# Altium PCB EST_MainV20.PcbDoc (part 7 of 7)
Units mil, origin at the board's own origin, x right, y up, seen from the top; angles counter-clockwise.
Board outline 2745 x 4540 mil, 2 copper layers (Top Layer, Bottom Layer); 326 components, 241 nets, 1052 pads, 399 vias.
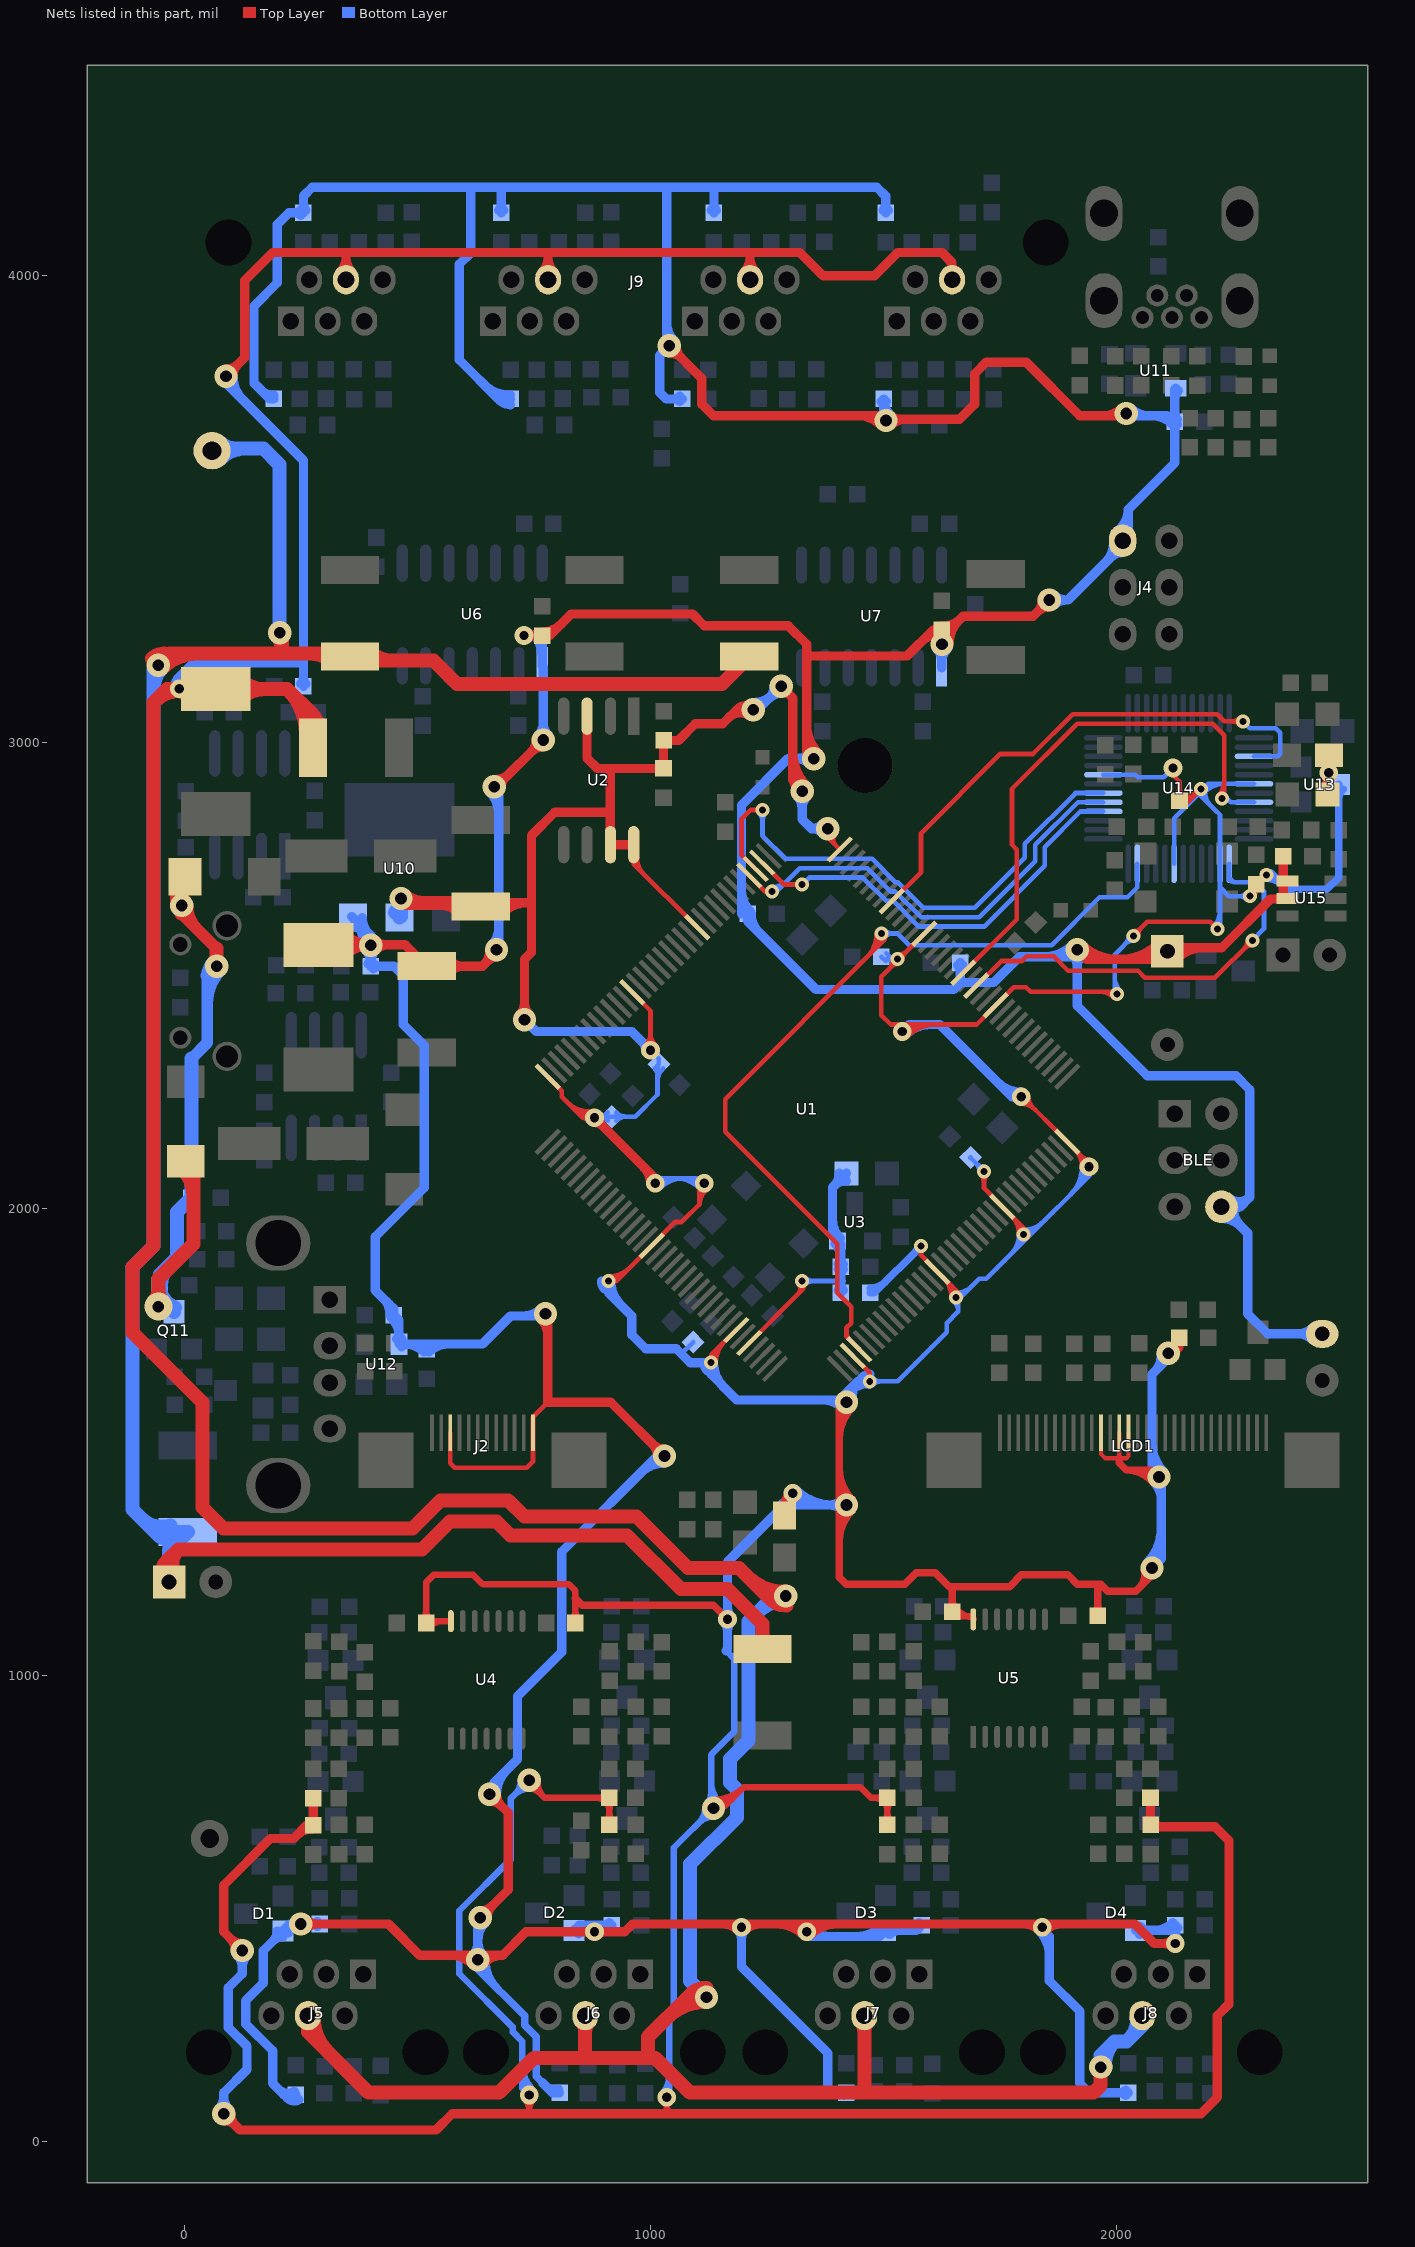
[diagram p7: the nets of this part, all layers, seen from the top]

## Via types
v1: diameter 30, hole 15, Top Layer to Bottom Layer, 237 vias
v2: diameter 50, hole 25, Top Layer to Bottom Layer, 93 vias
v3: diameter 40, hole 20, Top Layer to Bottom Layer, 68 vias
v4: diameter 60, hole 25, Top Layer to Bottom Layer, 1 vias

## Nets (pads, with @x,y where several pads share a name; then routed paths per layer and width w, separated by ;. In a path a pad name is that pad's centre, name@x,y a point inside that pad or via, vN(x,y) a via of type N, cw(c..) or ccw(c..) an arc to the next point about the centre after c; other vN are vias at no path point) (continued)
V33: C11.2 C24.1 C26.1 C28.1 C30.1 C70.1 C71.2 C83.1 C84.1 C85.1 E7.1 L1.2 LCD1.16 LCD1.17 LCD1.19 R2.1 R5.2 R6.1 R7.2 R12.2 R61.1 R62.1 R63.1 R64.1 R73.1 R74.1 R75.1 R76.1 R164.2 R165.1 U1.17 U1.30 U1.39 U1.52 U1.62 U1.72 U1.84 U1.95 U1.108 U1.121 U1.131 U1.144 U2.3 U2.7 U2.8 U4.14 U5.14 U10.2 U13.3 U14.6 U14.14 U14.19 U14.32 | length 26522.3
  Top Layer w9: LCD1.19@1965.67,1520 1965.67,1474.33 1975,1465 2005.04,1465 ; LCD1.17@2005.04,1520 2005.04,1465.04 ; LCD1.16@2024.72,1520 2024.72,1469.72 2020,1465 2005.04,1465
  Top Layer w10: U1.144@779.73,2282.96 810,2252.69 810,2240 855,2195 v3(880,2195) ; 822.5,2227.5 ccw(c867.26,2272.26) v3@877.56,2209.8 ; 836.27,2213.73 ccw(c871.16,2248.62) v3@879.19,2199.93 ; 850.04,2199.96 ccw(c875.06,2224.97) v3@880.81,2190.07 ; v1@910,1855 ccw(c910,1918.7) 955.05,1873.66 ; 937.98,1856.59 cw(c910,1884.56) v1(910,1845) 926.39,1845 U1.17@1002.44,1921.06 1053.19,1971.81 1066.81,1971.81 1105,2010 v3@1105,2065 ; U1.131@960.69,2463.91 1000,2424.6 v3(1000,2340) ; U2.8@961,2752.41 ccw(c986.16,2752.41) 968.37,2734.61 ; U2.8@964,2780.41 964,2738.99 ; U2.8@971,2752.41 ccw(c1020.31,2752.41) 985.44,2717.54 ; v3@989.39,2350.61 ccw(c963.79,2376.21) 1000,2376.21 ccw(c1036.21,2376.21) v3@1010.61,2350.61 ; v3@1010,2065 v3@1015,2065 ; U1.121@1099.88,2603.11 964,2738.99 ; 1105,2008.9 cw(c1145,2008.9) v3@1123.18,2042.43 ; 1105,2027.34 cw(c1133,2027.34) v3@1117.73,2050.81 ; v1@1140,1670 cw(c1204.48,1670) U1.30@1158.89,1715.59 ; 1141.81,1698.52 ccw(c1170.34,1670) v1(1130,1670) 1130,1686.71 U1.30@1183.4,1740.1 ; v2(1380,2815) 1380,2796.25 U1.108@1406.11,2770.14 ; v2@1387.77,2808.7 ccw(c1400.16,2798.65) 1388.88,2787.37 ; v2@1395.54,2802.4 ccw(c1408.83,2791.62) 1396.73,2779.52 ; U1.39@1433.94,1684.43 1470,1648.37 v1(1470,1630) ; 1510.9,2513.03 ccw(c1488.93,2535) v1@1520,2535 ; 1517.83,2519.96 cw(c1530,2507.79) v1@1530,2525 ; v1@1530,2545 ccw(c1530,2576.07) 1551.97,2554.1 ; v3@1536.46,2383.54 cw(c1564.14,2355.86) 1564.14,2395 ; v1@1540,2535 cw(c1557.21,2535) 1545.04,2547.17 ; v3@1543.54,2376.46 cw(c1588.28,2331.72) 1588.28,2395 ; v3@1550.61,2369.39 cw(c1612.43,2307.57) 1612.43,2395 ; v1(1580,1920) 1580,1900.28 U1.52@1614.9,1865.38 1660,1820.28 v1@1660,1805 ; U1.95@1587.06,2589.19 1495,2497.13 1495,2415 1515,2395 1699.1,2395 U1.84@1740.17,2436.07 1779.1,2475 1805,2475 1815,2465 1995,2465 v1(2000,2460) ; U1.52@1627.13,1853.15 cw(c1583.98,1810) v1@1645,1810 ; 1644.2,1836.08 cw(c1618.12,1810) v1(1655,1810) ; v1@1707.93,2072.93 cw(c1690.86,2055.86) 1715,2055.86 cw(c1739.14,2055.86) v1@1722.07,2072.93 ; v1(1715,2080) 1715,2043.66 U1.62@1754.09,2004.57 1810,1948.66 v1@1810,1940 ; U1.62@1773.27,1985.4 cw(c1732.87,1945) v1@1790,1945 ; 1790.34,1968.32 cw(c1767.01,1945) v1(1800,1945) ; v3@1792.05,2245 U1.72@1893.28,2143.77 v3@1940,2097.05 ; v3@1795,2225 cw(c1795,2183.84) 1824.11,2212.94 ; v3@1810,2240 ccw(c1841.26,2240) 1819.16,2217.89 ; U1.72@1909.41,2127.64 cw(c1871.76,2090) v3@1925,2090 ; 1926.48,2110.57 cw(c1905.91,2090) v3@1935,2090 ; 1926.43,2110.62 ccw(c1940,2124.19) v3@1940,2105 ; 1963.79,2465 cw(c1963.79,2423.79) v1@1992.93,2452.93 ; v1(2035,2585) 2065,2615 2200,2615 v1(2215,2600) ; v1@2035,2595 ccw(c2035,2619.14) 2052.07,2602.07 ccw(c2069.14,2585) v1@2045,2585 ; v3(2120,2945) 2120,2930 2134,2916 R165.1@2134,2875.02 2155.02,2875.02 ; R165.1@2125.01,2884.01 ccw(c2103.3,2905.72) 2134,2905.72 ccw(c2164.7,2905.72) R165.1@2142.99,2884.01 ; R165.1@2132.41,2867.91 ccw(c2137.56,2890.96) 2154.26,2874.26 ; R165.1@2134.59,2877.67 ccw(c2142.25,2912.01) 2167.13,2887.13 ; R165.1@2136.77,2887.43 ccw(c2146.94,2933.05) v1(2180,2900) 2155.02,2875.02 ; R165.1@2145.26,2869.12 cw(c2155.02,2864.01) 2155.02,2875.02 ; R165.1@2145.26,2880.92 ccw(c2155.02,2886.02) 2155.02,2875.02 ; v1@2290,2670 2298.84,2678.84 C70.1@2298.84,2695.88 ; 964,2738.99 ccw(c954.63,2738.99) 959.99,2746.67 cw(c954.63,2738.99) 964,2738.99 ; 964,2738.99 cw(c973.37,2738.99) 968.01,2746.67 ccw(c973.37,2738.99) 964,2738.99
  Top Layer w14: R74.1@511.42,1119.59 ccw(c493.13,1137.89) 519,1137.89 ccw(c544.87,1137.89) R74.1@526.58,1119.59 ; R74.1@526.58,1104.44 cw(c554.41,1076.6) 554.41,1115.97 ; U4.14@572,1115.97 522.95,1115.97 R74.1@519,1112.02 519,1199 535,1215 620,1215 640,1195 825,1195 839,1181 839,1165 R75.1@839,1112.02 ; v3@730.81,90.81 cw(c708.62,68.62) 740,68.62 cw(c771.38,68.62) v3@749.19,90.81 ; 740,60 v3(740,100) ; v2@740,757 cw(c740,725.62) 762.19,747.81 ; v2@745,765 773.12,736.88 C26.1@911.84,736.88 R62.1@911.84,679.14 ; v2@757.95,773.62 ccw(c801.51,770.28) 770.62,739.38 ; R75.1@831.42,1119.59 ccw(c813.13,1137.89) 839,1137.89 ccw(c864.87,1137.89) R75.1@846.58,1119.59 ; C26.1@904.27,744.46 cw(c885.97,762.75) 885.97,736.88 cw(c885.97,711.01) 904.27,729.3 cw(c885.97,711.01) 911.84,711.01 cw(c937.71,711.01) C26.1@919.42,729.3 ; R62.1@904.41,686.58 ccw(c886.45,704.53) 911.84,704.53 ; 911.84,705.21 ccw(c938.2,705.21) R62.1@919.56,686.58 ; 1035,60 1040,65 ; 1035,65 v3(1035,95) ; v2(1135,715) 1130,720 1160,720 1200,760 1450,760 1473.12,736.88 C28.1@1507.84,736.88 1507.84,679.14 R63.1@1507.98,679 ; v2@1135,719 ccw(c1135,776.94) 1175.97,735.97 ; v2@1135,733 ccw(c1135,824.74) 1199.87,759.87 ; C28.1@1500.27,744.46 cw(c1481.97,762.75) 1481.97,736.88 cw(c1481.97,711.01) 1500.27,729.3 cw(c1481.97,711.01) 1507.84,711.01 cw(c1533.71,711.01) C28.1@1515.42,729.3 ; R63.1@1500.41,686.58 ccw(c1482.45,704.53) 1507.84,704.53 ; 1507.84,705.21 ccw(c1534.2,705.21) R63.1@1515.56,686.58 ; R76.1@1639,1126.02 1688.05,1126.02 cw(c1688.05,1166.32) R76.1@1655.62,1142.38 ; 1679.09,1126.02 cw(c1679.09,1107.06) U5.14@1692.5,1120.46
  Top Layer w16: 839,1165 854,1150 1135,1150 v3(1165,1120) ; L1.2@1280.78,1362.8 ccw(c1277.09,1372.06) 1287.06,1372.06 ; L1.2@1287.06,1338.76 cw(c1333.88,1338.76) v3@1310.89,1379.55 ; L1.2@1287.06,1342 1287.06,1372.06 ; L1.2@1287.06,1366.15 cw(c1318.45,1366.15) v3@1303.04,1393.48 ; L1.2@1287.91,1347.54 cw(c1307.07,1359.86) v3@1290.96,1375.96 ; L1.2@1293.35,1362.8 cw(c1297.04,1372.06) 1287.06,1372.06 ; L1.2@1301.36,1356.19 cw(c1324.16,1370.84) v3(1305,1390) 1287.06,1372.06 ; 1405,1287.75 cw(c1497.25,1287.75) v2@1432.02,1352.98 ; 1405,1326.37 cw(c1458.63,1326.37) v2@1420.71,1364.29 ; 1405,1403.63 ccw(c1458.63,1403.63) v2@1420.71,1365.71 ; 1405,1442.25 ccw(c1497.25,1442.25) v2@1432.02,1377.02 ; 1405,1507.75 cw(c1497.25,1507.75) v2@1432.02,1572.98 ; 1405,1546.37 cw(c1458.63,1546.37) v2@1420.71,1584.29 ; v2@1415,1600 1405,1590 1405,1210 1420,1195 1545,1195 1570,1220 1610,1220 1640,1190 1647,1190 ; R76.1@1640.13,1142.89 ccw(c1623.54,1159.47) 1647,1159.47 ccw(c1670.46,1159.47) R76.1@1653.87,1142.89 ; R76.1@1647,1136.02 1647,1190 ; R73.1@1952.13,1134.89 ccw(c1935.54,1151.47) 1959,1151.47 ccw(c1982.46,1151.47) R73.1@1965.87,1134.89 ; R73.1@1952.23,1134.99 ccw(c1936.68,1151) 1959,1151 ; R73.1@1965.77,1134.99 cw(c1981.32,1151) 1959,1151 ; 2005.04,1465 2005.04,1455 2020.04,1440 ; 2047.5,1187.5 ccw(c2018.39,1216.62) v2@2058.46,1226.09 ; 2055.02,1440 cw(c2055.02,1394.77) v2@2089.24,1424.35 ; v2@2077.14,1413.88 ccw(c2020.04,1364.53) 2020.04,1440 ; v2@2080,1235 2080,1220 2040,1180 1980,1180 1965,1195 ; v2@2095,1425 v2(2090,1425) 2075,1440 2020.04,1440 ; v1@2315,2720 v1@2320,2720 ; 1647,1190 1770,1190 1795,1215 1895,1215 1915,1195 1965,1195 ; 1959,1151 R73.1@1959,1128.02 1959,1189 1965,1195
  Top Layer w20: v2@85,45 cw(c85,8.79) 110.61,34.39 cw(c136.21,60) v2@100,60 ; v2(85,60) 120,25 540,25 575,60 740,60 1035,60 2180,60 2215,95 2215,270 2240,295 2240,645 2210,675 2075.98,675 R64.1@2071.98,679 2071.84,679.14 C30.1@2071.84,736.88 ; v2@110,410 ccw(c73.79,410) 99.39,435.61 ccw(c125,461.21) v2@125,425 ; v2(125,410) 85,450 85,550 185,650 235,650 263.72,678.72 R61.1@277.17,678.72 C24.1@277.17,736.46 ; 241.04,656.04 cw(c277.17,619.9) R61.1@277.17,671 ; C24.1@271.57,731.15 cw(c258.06,717.63) 277.17,717.63 ; R61.1@271.72,684.18 ccw(c258.54,697.35) 277.17,697.35 ccw(c295.8,697.35) R61.1@282.63,684.18 ; 277.17,718.31 cw(c295.32,718.31) C24.1@282.49,731.15 ; E7.1@616,2656 636,2656 741,2656 745,2660 ; E7.1@682.64,2633.86 cw(c736.1,2580.4) 736.1,2656 ; E7.1@682.64,2662.14 ccw(c697.47,2676.97) E7.1@697.47,2656 ; v2@719.39,2415.61 ccw(c693.79,2441.21) 730,2441.21 ccw(c766.21,2441.21) v2@740.61,2415.61 ; v2(730,2405) 730,2535 745,2550 745,2660 ; U2.3@864,3056 864,2966 886.12,2943.88 915,2943.88 ; v3@880,2185 cw(c880,2160.86) 897.07,2177.93 cw(c914.14,2195) v3@890,2195 ; v3(880,2195) v3@1010,2065 ; U2.8@964,2780.41 U2.7@914,2780.41 914,2850 ; 985.86,2089.14 cw(c951.72,2055) v3@1000,2055 ; C11.2@1022.39,2938.42 ccw(c1009.21,2925.25) 1009.21,2943.88 ccw(c1009.21,2962.5) 1022.39,2949.33 ccw(c1008.87,2962.84) 1027.98,2962.84 ; R7.2@1022.53,2998.55 cw(c1009.35,2985.38) 1027.98,2985.38 cw(c1046.61,2985.38) 1033.44,2998.55 cw(c1046.61,2985.38) 1046.61,3004.01 cw(c1046.61,3022.64) R7.2@1033.44,3009.46 ; 1027.98,2962.16 ccw(c1046.13,2962.16) C11.2@1033.3,2949.33 ; 1167.5,3052.5 cw(c1192.74,3027.26) v2@1211.93,3057.35 ; 1170.21,3055.21 cw(c1218.06,3007.35) v2@1220.15,3075 ; 1185.11,3070.11 cw(c1206.46,3048.77) v2@1222.69,3074.22 ; v2@1209.14,3059.66 ccw(c1185,3036.67) 1185,3070 ; v2@1209.14,3080.34 cw(c1185,3103.33) 1185,3070 ; v2(1220,3070) 1185,3070 ; v2(1280,3120) 1305,3095 1305,2920 v2@1320,2905 ; 1305,2931.21 ccw(c1361.21,2931.21) v2@1321.46,2891.46 ; 1305,2979.5 ccw(c1409.5,2979.5) v2@1335.61,2905.61 ; C30.1@2066.39,731.43 cw(c2053.21,718.25) 2071.84,718.25 cw(c2090.47,718.25) C30.1@2077.3,731.43 ; R64.1@2066.53,684.46 ccw(c2053.7,697.29) 2071.84,697.29 ; 2071.84,697.97 ccw(c2090.95,697.97) 2077.44,684.46 ccw(c2100.27,707.29) 2100.27,675 ; v2@2110,1680 2133,1703 R2.1@2133,1723.98 ; v2@2120.49,1690.49 ccw(c2101.39,1709.59) R2.1@2125.98,1720.79 ; R2.1@2127.54,1718.53 cw(c2114.37,1705.35) 2133,1705.35 cw(c2151.63,1705.35) R2.1@2138.46,1718.53 ; C71.2@2440.64,2898.96 ccw(c2408.4,2931.2) v3@2454,2931.2 ; R164.2@2443.39,2961.33 cw(c2417.79,2935.72) 2454,2935.72 cw(c2490.21,2935.72) R164.2@2464.61,2961.33 ; v3@2446.93,2927.93 cw(c2429.86,2910.86) 2454,2910.86 cw(c2478.14,2910.86) v3@2461.07,2927.93 ; v3@2446.93,2942.07 ccw(c2429.86,2959.14) 2454,2959.14 ccw(c2478.14,2959.14) v3@2461.07,2942.07 ; C71.2@2451.67,2887.94 2454,2890.27 v3(2454,2935) R164.2@2454,2971.94 ; v3@2454,2919.95 ccw(c2483.68,2919.95) C71.2@2462.69,2898.96 ; 745,2660 745,2800 795,2850 914,2850 ; 914,2850 914,2942.88 915,2943.88 ; 915,2943.88 C11.2@1027.84,2943.88 1027.98,2944.02 R7.2@1027.98,3004.01 1060,3004.01 1095.99,3040 1155,3040 1185,3070
  Top Layer w30: v2(465,2665) 474,2656 E7.1@616,2656 ; v2@472.07,2672.07 ccw(c510.87,2710.87) 510.87,2656 ; 547.97,2656 cw(c547.97,2592.47) E7.1@592.89,2637.39
  Bottom Layer w10: v3(880,2195) 882.37,2197.37 R12.2@917.39,2197.37 ; v3@890.61,2205.61 ccw(c910.5,2225.5) R12.2@910.5,2197.37 ; v3@891.46,2185.32 cw(c917.39,2163.44) R12.2@917.39,2197.37 ; R12.2@908.4,2188.37 ccw(c886.69,2166.67) 886.69,2197.37 ccw(c886.69,2228.07) R12.2@908.4,2206.36 ; R12.2@926.38,2188.37 cw(c948.09,2166.67) 948.09,2197.37 cw(c948.09,2228.07) R12.2@926.38,2206.36 ; v3(1000,2340) 1017.89,2322.11 C84.1@1017.89,2309.89 1015,2307.01 1015,2245 967.37,2197.37 R12.2@917.39,2197.37 ; C84.1@1008.89,2300.9 cw(c994.15,2286.16) 1015,2286.16 ; v3@1013.54,2051.46 cw(c1046.21,2018.79) 1046.21,2065 ; v3@1015,2065 v3@1105,2065 ; 1015,2272.23 cw(c1055.55,2272.23) C84.1@1026.88,2300.9 ; v3@1020.61,2044.39 cw(c1070.36,1994.64) 1070.36,2065 ; 1054.64,2065 cw(c1054.64,1994.64) v3@1104.39,2044.39 ; 1067.18,1690 R5.2@1091.4,1714.22 ; 1078.79,2065 cw(c1078.79,2018.79) v3@1111.46,2051.46 ; v1(1470,1630) 1530,1630 1635,1735 1635,1755 1660,1780 1660,1805 1705,1850 1720,1850 1810,1940 1940,2070 v3(1940,2090) ; v1@1477.07,1622.93 cw(c1494.14,1605.86) 1494.14,1630 cw(c1494.14,1654.14) v1@1477.07,1637.07 ; C83.1@1495.12,2540.16 1500.28,2535 v1(1530,2535) cw(c1530,2565.26) C83.1@1505.44,2547.58 ; C83.1@1504.11,2531.17 cw(c1513.37,2521.91) 1513.37,2535 ; v1@1522.93,2527.93 ccw(c1505.86,2510.86) 1505.86,2535 ccw(c1505.86,2559.14) v1@1522.93,2542.07 ; v1@1648.91,1802.07 cw(c1631.67,1779.59) 1660,1779.59 ; v1(1655,1810) ccw(c1655,1834.14) 1672.07,1817.07 ; v1@1655,1820 ccw(c1655,1868.28) 1689.14,1834.14 ; C85.1@1686.11,2110.11 1686.11,2108.89 v1(1715,2080) ; v1@1705,2080 ccw(c1680.86,2080) 1697.93,2097.07 ccw(c1715,2114.14) v1@1715,2090 ; 1772.32,1902.32 ccw(c1729.64,1945) v1@1790,1945 ; 1789.39,1919.39 ccw(c1763.79,1945) v1(1800,1945) ccw(c1800,1981.21) 1825.61,1955.61 ; v1@1800,1955 ccw(c1800,2015.36) 1842.68,1972.68 ; 1900.25,2030.25 ccw(c1840.5,2090) v3@1925,2090 ; 1917.32,2047.32 ccw(c1874.64,2090) v3@1935,2090 ; 1934.39,2064.39 ccw(c1908.79,2090) v3@1945,2090 ; U14.32@1970.91,2930.52 2039.48,2930.52 2045,2925 2100,2925 v3(2120,2945) ; v1@1995,2465 1995,2545 v1(2035,2585) ; 1995,2496.21 ccw(c2036.21,2496.21) v1@2007.07,2467.07 ; v1@2025,2585 cw(c2000.86,2585) 2017.93,2567.93 cw(c2035,2550.86) v1@2035,2575 ; U14.19@2122.48,2739.57 2122.48,2837.48 v1@2182.5,2897.5 ; 2159.39,2874.39 ccw(c2133.79,2900) v1@2170,2900 ; 2171.46,2886.46 cw(c2180,2877.93) v1@2180,2890 ; v1@2176.59,2888.41 2207.5,2857.5 ; v1@2182.5,2887.5 v1@2182.5,2897.5 ; 2186.65,2878.35 cw(c2203.76,2895.45) v1(2180,2900) cw(c2206.16,2873.84) 2206.16,2910.83 ; v1@2187.07,2892.93 cw(c2230.3,2849.7) 2230.3,2910.83 ; v1@2189.82,2898.12 ccw(c2226.16,2891.16) 2200,2865 ; v1@2207.93,2607.07 ccw(c2176.6,2638.4) 2220.91,2638.4 ; 2215,2850 2207.5,2857.5 ; 2220.91,2614.26 cw(c2200.74,2614.26) v1(2215,2600) 2220.91,2605.91 2220.91,2689.09 ; v1@2277.93,2662.93 ccw(c2260.86,2645.86) 2260.86,2670 ccw(c2260.86,2694.14) v1@2277.93,2677.07 ; v1(2285,2670) 2240,2670 2220.91,2689.09 ; U14.6@2293.74,2910.83 2195.83,2910.83 v1@2182.5,2897.5 ; 2207.5,2857.5 2220.91,2844.09 U14.14@2220.91,2739.57 2220.91,2689.09
  Bottom Layer w14: v2@722,775 cw(c678.54,775) 709.27,744.27 cw(c740,713.54) v2@740,757 ; 725,133.8 ccw(c773.8,133.8) v3@739.29,99.29 ; 725,167.6 ccw(c807.6,167.6) v3@749.19,109.19 ; v3(740,100) 725,115 725,215 705,235 705,245 590,360 590,495 700,605 700,735 730,765 v2@745,765 ; v3@1025.81,104.19 ccw(c991.54,138.46) 1040,138.46 ; v3@1040,95 1040,280 1050,290 1050,630 1130,710 v2@1130,720 ; v2@1117,715 cw(c1073.54,715) 1104.27,684.27 cw(c1135,653.54) v2@1135,697 ; v2@1122.27,727.73 ccw(c1103.62,746.38) 1130,746.38 ; 1130,770.53 ccw(c1190.53,770.53) v2@1147.73,727.73 ; v2(1135,715) v2@1130,720 ; 1162.5,1052.5 1180,1035 1180,880 1130,830 v2@1130,720 ; 1287.06,1365 1287.06,1372.06 v3(1305,1390)
  Bottom Layer w16: R6.1@1471,1819.98 1479.98,1819.98 v1(1580,1920) ; R6.1@1471,1829.7 ccw(c1471,1874.85) 1502.92,1842.92 ; v1@1573,1920 cw(c1556.1,1920) 1568.05,1908.05 cw(c1580,1896.1) v1@1580,1913 ; v1@2315,2720 2330,2720 2365,2685 2450,2685 2475,2710 U13.3@2475,2910 ; v1@2320,2708 cw(c2320,2654.89) 2357.56,2692.44 ; U13.3@2464.75,2899.75 cw(c2439.99,2874.99) 2475,2874.99 cw(c2510.01,2874.99) U13.3@2485.25,2899.75
  Bottom Layer w20: v2@74.39,70.61 ccw(c48.79,96.21) 85,96.21 ccw(c121.21,96.21) v2@95.61,70.61 ; v2(85,60) 85,105 135,155 135,205 95,245 95,330 125,360 v2(125,410) ; v2@114.39,399.39 cw(c88.79,373.79) 125,373.79 cw(c161.21,373.79) v2@135.61,399.39 ; v2(730,2405) 755,2380 960,2380 v3(1000,2340) ; v1@895,1845 ccw(c919.14,1845) 902.07,1827.93 ; v1(910,1845) 910,1820 960,1770 960,1730 990,1700 1055,1700 1085,1670 v1(1130,1670) 1130,1645 1185,1590 1405,1590 1445,1630 ; v1@915,1845 ccw(c987.43,1845) 936.21,1793.79 ; v3@990,2340 ccw(c965.86,2340) 982.93,2357.07 ccw(c1000,2374.14) v3@1000,2350 ; v1@1115,1670 ccw(c1139.14,1670) 1122.07,1652.93 ; v1@1135,1670 ccw(c1207.43,1670) 1156.21,1618.79 ; v3@1157.93,1112.93 cw(c1140.86,1095.86) 1165,1095.86 cw(c1189.14,1095.86) v3@1172.07,1112.93 ; v3@1157.93,1127.07 ccw(c1140.86,1144.14) 1165,1144.14 ccw(c1189.14,1144.14) v3@1172.07,1127.07 ; 1162.5,1052.5 1165,1055 v3(1165,1120) 1165,1242.94 1287.06,1365 v2(1420,1365) ; v2(1220,3070) 1230,3070 v2(1280,3120) ; v2@1220,3085 ccw(c1220,3145.36) v2@1262.68,3102.68 ; v2@1265,3120 cw(c1228.79,3120) 1254.39,3094.39 cw(c1280,3068.79) v2@1280,3105 ; 1283.79,1368.79 ccw(c1292.93,1377.93) 1292.93,1365 ; v3@1297.93,1382.93 ccw(c1341.21,1426.21) 1341.21,1365 ; v3@1312.07,1397.07 ccw(c1389.5,1474.5) 1389.5,1365 ; v2@1314.39,2884.39 cw(c1288.79,2858.79) 1325,2858.79 cw(c1361.21,2858.79) v2@1335.61,2884.39 ; v2(1325,2895) 1325,2835 1345,2815 ; v2@1369.14,2804.66 ccw(c1345,2781.67) 1345,2815 ; v2@1369.14,2825.34 cw(c1345,2848.33) 1345,2815 ; 1371.72,1590 cw(c1371.72,1536.72) v2@1409.39,1574.39 ; v2(1380,2815) 1345,2815 ; v2@1409.39,1354.39 ccw(c1383.79,1328.79) 1383.79,1365 ccw(c1383.79,1401.21) v2@1409.39,1375.61 ; v2@1418.79,1603.79 cw(c1470,1552.57) v1@1470,1625 ; v2@1434.42,1589.13 cw(c1474.42,1600.58) 1445,1630 ; 1452.93,1637.93 cw(c1470,1620.86) 1470,1645 ; v1(1470,1630) 1445,1630 ; v3(1540,2380) 1555,2395 1620,2395 1775,2240 v3(1795,2240) ; v3@1547.07,2372.93 cw(c1600.36,2319.64) 1600.36,2395 ; 1743.79,2271.21 ccw(c1795,2322.43) v3@1795,2250 ; v2@2064.39,1240.61 ccw(c1990.5,1314.5) 2095,1314.5 ; 2075,1449.14 ccw(c2114.14,1449.14) v2@2086.46,1421.46 ; 2075,1497.43 ccw(c2162.43,1497.43) v2@2100.61,1435.61 ; v2@2078.54,1226.46 ccw(c2038.79,1266.21) 2095,1266.21 ; v2@2079.39,1414.39 cw(c2041.72,1376.72) 2095,1376.72 ; v2@2080,1235 2095,1250 v2@2095,1425 ; 2080,1650 ccw(c2043.56,1686.44) v2@2095.02,1689.2 ; v2(2090,1425) 2075,1440 2075,1645 v2@2110,1680
  Bottom Layer w30: U10.2@451.85,2635.04 ccw(c424.31,2665) v2(465,2665) 465,2627 U10.2@462,2624
  other v1: 2320,2715
  other v2: 740,775 2075,1230 1420,1585 2110,1690
  other v3: 1010,2055 1115,2055
VBAT: F1.1 F2.1 F3.1 F4.2 J10.1 pad.0@60,3625 | length 6444.1
  Top Layer w30: v2@-69.14,3179.14 cw(c-42.93,3152.93) -42.93,3190 ; v2(-55,3165) -30,3190 210,3190 ; v2@-47.93,3157.93 cw(c29.5,3080.5) 29.5,3190 ; J10.1@-46.14,1214.14 ccw(c-80.28,1248.28) -32,1248.28 ccw(c16.28,1248.28) J10.1@-17.86,1214.14 ; J10.1@-39.98,1193.98 cw(c-8.51,1217.73) -36.39,1245.61 ; J10.1@-32,1200 -32,1250 -12,1270 ; J10.1@-16.04,1212.05 cw(c19.29,1238.7) -12,1270 ; v2@197.93,3227.93 cw(c168.79,3198.79) 210,3198.79 ; v2(205,3235) 210,3230 210,3190 ; 272.8,3190 cw(c272.8,3133.3) F2.1@312.89,3173.39 ; F2.1@399.11,3194.61 ccw(c446.44,3241.94) 446.44,3175 ; 935,3125 955,3125 ; F3.1@1212,3184 1153,3125 955,3125 ; F1.1@1229.39,1066.61 ccw(c1203.79,1092.21) 1240,1092.21 ccw(c1276.21,1092.21) F1.1@1250.61,1066.61 ; F1.1@1240,1076 1240,1110 1165,1185 1065,1185 950,1300 700,1300 670,1330 570,1330 510,1270 -12,1270 ; 210,3190 350,3190 F2.1@356,3184 365,3175 535,3175 585,3125 955,3125
  Bottom Layer w30: -91.25,1336.25 ccw(c-47.94,1379.56) F4.2@-29.11,1321.27 ; -65,3116.72 cw(c-6.72,3116.72) v2@-47.93,3157.93 ; -56.56,1301.56 ccw(c-31,1327.13) F4.2@-19.89,1292.73 ; v2(-55,3165) -65,3155 -65,1920 -110,1875 -110,1355 -62,1307 F4.2@8,1307 -32,1267 J10.1@-32,1200 ; J10.1@-46.14,1214.14 ccw(c-80.28,1248.28) -32,1248.28 ccw(c16.28,1248.28) J10.1@-17.86,1214.14 ; F4.2@-35.11,1296.39 ccw(c-60.71,1270.79) -60.71,1307 ccw(c-60.71,1343.21) F4.2@-35.11,1317.61 ; -32,1252.68 cw(c29.82,1252.68) F4.2@-13.89,1296.39 ; -32,1266.3 cw(c1.05,1266.3) F4.2@-16.52,1294.3 ; pad.0@65,3630 170,3630 205,3595 v2(205,3235) ; pad.0@77.68,3607.32 cw(c132.43,3552.57) 132.43,3630 ; pad.0@77.68,3642.68 ccw(c108.28,3673.28) 108.28,3630
VCC: BLE.6 C39.1 C47.1 C61.2 C62.2 C68.1 C78.2 D1.3 D2.3 D3.3 D4.3 E6.1 J1.1 J2.1 J2.10 J3.1 J4.1 L3.2 R17.1 R18.1 R19.1 R20.1 R49.1 R51.1 R53.1 R55.1 R97.2 R98.2 R109.1 R110.1 R115.2 R116.2 R127.1 R128.1 R137.2 R144.2 R161.1 U6.1 U7.1 U10.3 U11.4 U12.4 U15.4 U15.5 | length 24724.7
  Top Layer w10: J2.10@570.83,1520 570.83,1454.17 580,1445 735,1445 748,1458 J2.1@748,1520 748,1553 780,1585
  Top Layer w20: v2(250,466.74) 438.26,466.74 505,400 683.26,400 ; v2@260.61,456.13 cw(c286.21,430.52) 286.21,466.74 cw(c286.21,502.95) v2@260.61,477.34 ; L3.2@288,2565.86 474.14,2565.86 E6.1@520,2520 640,2520 670,2550 v2(670,2555) ; L3.2@341.89,2539.52 cw(c405.47,2475.94) 405.47,2565.86 cw(c405.47,2655.77) L3.2@341.89,2592.19 ; L3.2@361.71,2565.86 cw(c361.71,2526.72) v2@389.39,2554.39 ; 365.85,2565.86 ccw(c365.85,2599.14) v2@389.39,2575.61 ; v2@410.6,2554.39 cw(c438.28,2526.72) 438.28,2565.86 ; v2@410.6,2575.61 ccw(c434.13,2599.14) 434.13,2565.86 ; 479.23,2560.77 cw(c452.61,2534.15) E6.1@487.5,2520 ; E6.1@566.64,2505.86 cw(c600.78,2471.72) 600.78,2520 cw(c600.78,2568.28) E6.1@566.64,2534.14 ; 569.64,400 cw(c569.64,329.64) v2@619.39,379.39 ; v2(635,480) 695,540 695,705 v2@665,735 ; v2@635,495 ccw(c635,531.21) 660.61,505.61 ccw(c686.21,480) v2@650,480 ; v2@641.54,380.42 cw(c683.26,345.76) 683.26,400 ; 642.5,2522.5 ccw(c612.22,2552.78) v2@655.01,2554.42 ; 652.93,2532.93 cw(c670,2515.86) v2@670,2540 ; v2@655,730 cw(c655,693.79) 680.61,719.39 cw(c706.21,745) v2@670,745 ; v2@665,2920 ccw(c665,2968.28) 699.14,2934.14 ; v2@670,2905 v2(770,3005) ; v2@680,2905 cw(c704.14,2905) 687.07,2922.07 ; v3(728.88,3228.88) C39.1@767.84,3228.88 783.88,3228.88 830,3275 1090,3275 1115,3250 1295,3250 1335,3210 1335,3185 ; v3@735.95,3221.81 cw(c753.02,3204.74) 753.02,3228.88 cw(c753.02,3253.02) v3@735.95,3235.95 ; v2@755,3005 cw(c718.79,3005) 744.39,2979.39 cw(c770,2953.79) v2@770,2990 ; C39.1@762.39,3223.43 ccw(c749.21,3210.25) 749.21,3228.88 ccw(c749.21,3247.51) C39.1@762.39,3234.34 ; v2@764.39,1764.39 cw(c726.72,1726.72) 780,1726.72 ; C39.1@767.84,3236.6 ccw(c767.84,3293.95) 808.4,3253.4 ; v2@770,1770 780,1760 780,1585 915,1585 v2(1029.94,1470.06) ; v3@872.93,442.93 ccw(c855.86,425.86) 855.86,450 ccw(c855.86,474.14) v3@872.93,457.07 ; v3@887.07,442.93 cw(c904.14,425.86) 904.14,450 cw(c904.14,474.14) v3@887.07,457.07 ; v2@1014.94,1470.06 ccw(c978.73,1470.06) 1004.34,1495.66 ccw(c1029.94,1521.27) v2@1029.94,1485.06 ; v2@1040,3835 cw(c1040,3798.79) 1065.61,3824.39 cw(c1091.21,3850) v2@1055,3850 ; v2(1040,3850) 1110,3780 1110,3725 1135,3700 1495,3700 v2@1502.51,3692.49 ; 1154.6,466.74 cw(c1154.6,419.6) v3@1187.93,452.93 ; v3@1190,460 v3@1195,455 ; v3@1202.07,452.93 cw(c1235.4,419.6) 1235.4,466.74 ; 1270.45,466.74 cw(c1270.45,385.45) v3@1327.93,442.93 ; 1318.74,466.74 cw(c1318.74,433.74) v3@1342.07,457.07 ; v3@1327.93,457.07 cw(c1351.26,433.74) 1351.26,466.74 ; v3(1335,450) v3@1335,466.74 ; 1335,2989.14 ccw(c1374.14,2989.14) v2@1346.46,2961.46 ; 1335,3037.43 ccw(c1422.43,3037.43) v2@1360.61,2975.61 ; 1335,3160 1335,3145 ; v3@1342.07,442.93 cw(c1399.55,385.45) 1399.55,466.74 ; v2(1350,2965) 1335,2980 1335,3145 ; 1360,3185 1375,3185 ; 1444.64,3700 cw(c1444.64,3629.64) v2@1494.39,3679.39 ; v2@1505,3692.49 1662.49,3692.49 1695,3725 1695,3790 1720,3815 1805,3815 1920,3700 v2@2015,3700 ; v2@1515.61,3679.39 cw(c1547.22,3647.78) 1547.22,3692.49 ; v2@1515.61,3700.61 ccw(c1535.21,3720.21) 1535.21,3692.49 ; 1580.01,3215.01 cw(c1623.84,3171.17) C47.1@1623.84,3233.17 ; 1596.9,3231.9 cw(c1609.84,3218.97) C47.1@1619.69,3234.38 ; C47.1@1618.25,3235.57 ccw(c1605.88,3223.84) 1605.88,3240.88 ; C47.1@1618.25,3246.19 cw(c1605.88,3257.93) 1605.88,3240.88 ; C47.1@1618.39,3235.43 cw(c1602.42,3219.46) v2@1625,3219.46 ; C47.1@1623.84,3248.6 ccw(c1623.84,3308.36) 1666.1,3266.1 ; v2(1625,3210) 1625,3239.73 C47.1@1623.84,3240.88 ; v2@1640,3210 cw(c1712.43,3210) 1661.21,3261.21 ; 1799.6,466.74 cw(c1799.6,419.6) v3@1832.93,452.93 ; v2@1840,3305 cw(c1803.79,3305) 1829.39,3279.39 cw(c1855,3253.79) v2@1855,3290 ; v3@1847.07,452.93 cw(c1880.4,419.6) 1880.4,466.74 ; v2(1855,3305) 1820,3270 1670,3270 1640.88,3240.88 C47.1@1623.84,3240.88 ; v2@1911.46,2551.46 ccw(c1951.21,2591.21) 1951.21,2535 ; v2(1915,2555) 1935,2535 2091,2535 J1.1@2108,2552 2115.5,2559.5 2224.5,2559.5 2329.23,2664.23 2356.46,2664.23 2357.64,2665.4 2356.13,2666.91 C78.2@2356.13,2755.84 ; v2@1925.61,2565.61 ccw(c1999.5,2639.5) 1999.5,2535 ; 1971.72,3700 ccw(c1971.72,3753.28) v2@2009.39,3715.61 ; 2006.6,2535 ccw(c2006.6,2653.4) J1.1@2090.32,2569.68 ; 2054.89,2535 ccw(c2054.89,2605.11) J1.1@2104.46,2555.54 ; v3@2117.93,417.93 ccw(c2100.86,400.86) 2100.86,425 ccw(c2100.86,449.14) v3@2117.93,432.07 ; v3(2125,425) 2080,425 2038.26,466.74 v3@1335,466.74 ; J1.1@2125.68,2534.32 cw(c2186.46,2473.54) 2186.46,2559.5 ; J1.1@2125.68,2569.68 ccw(c2150.25,2594.25) 2150.25,2559.5 ; C78.2@2350.67,2750.39 cw(c2337.5,2737.21) 2356.12,2737.21 cw(c2374.75,2737.21) C78.2@2361.58,2750.39 ; 683.26,400 733.26,450 v3(880,450) 945,450 961.74,466.74 v3@1335,466.74 ; 1335,3145 1335,3185 ; 1335,3185 1375,3185 ; 1375,3185 1550,3185 1605.88,3240.88 ; 1605.88,3240.88 C47.1@1623.84,3240.88
  Bottom Layer w16: v2@630,400 v2(630,390) 630,370 730,270 730,250 755,225 755,140 768.43,126.57 ; v2@631,390 ccw(c681.7,390) 645.85,354.15 ; v2@647,390 ccw(c736.33,390) 673.16,326.84
  Bottom Layer w20: 165.15,3754.85 ccw(c192.02,3781.73) R97.2@192.02,3743.72 ; R97.2@192.02,3736.01 183.99,3736.01 150,3770 150,3935 200,3985 200,4110 225,4135 R109.1@256.02,4135 256.02,4171.02 275,4190 615,4190 ; D1.3@199.7,451.72 cw(c169.53,451.72) 190.87,430.38 cw(c212.2,409.04) D1.3@212.2,439.22 ; 202.99,112.01 ccw(c222.37,131.39) R49.1@236.11,107.68 ; 221.39,93.61 ccw(c235.87,108.09) R49.1@246.14,90.37 ; D1.3@224.1,447.88 cw(c250,439.52) v2(250,466.74) ; R49.1@234.53,95.54 ccw(c221.35,82.37) 221.35,101 ccw(c221.35,119.63) R49.1@234.53,106.46 ; R49.1@239.98,101 214,101 190,125 190,195 132.5,252.5 132.5,302.5 170,340 170,409.52 D1.3@212.2,451.72 227.22,466.74 v2(250,466.74) ; R109.1@250.56,4129.54 ccw(c237.39,4116.37) 237.39,4135 ccw(c237.39,4153.63) 250.56,4140.46 ccw(c237.39,4153.63) 256.02,4153.63 ccw(c274.65,4153.63) R109.1@261.47,4140.46 ; v2@260.61,456.13 cw(c286.21,430.52) 286.21,466.74 cw(c286.21,502.95) v2@260.61,477.34 ; R17.1@285.75,461.28 ccw(c272.57,448.11) 272.57,466.74 ccw(c272.57,485.37) R17.1@285.75,472.19 ; R17.1@291.2,466.74 v2(250,466.74) ; U10.3@359.53,2626.47 cw(c298.06,2565) v2@384.99,2565 ; U10.3@362,2604 cw(c362,2555.72) 396.14,2589.86 cw(c430.28,2624) U10.3@382,2624 ; U10.3@362,2624 399.99,2586.01 v2(399.99,2565) R137.2@399.99,2520.02 450,2520.02 470,2500.02 470,2395 515,2350 515,2045 410,1940 410,1825 440,1795 450,1785 R161.1@450.01,1771.98 461,1760.99 U12.4@461,1710 519.84,1710 640,1710 700,1770 v2@770,1770 ; v2@389.39,2554.39 cw(c363.78,2528.79) 399.99,2528.79 cw(c436.21,2528.79) v2@410.6,2554.39 ; 393.67,2592.33 cw(c366.35,2565) v2@404.99,2565 ; R137.2@394.54,2525.47 ccw(c381.36,2538.65) 399.99,2538.65 ccw(c418.62,2538.65) 405.45,2525.47 ccw(c418.62,2538.65) 418.62,2520.02 ccw(c418.62,2501.39) R137.2@405.45,2514.56 ; 427.64,1807.36 cw(c392.26,1771.98) R161.1@442.29,1771.98 ; R161.1@444.55,1766.53 cw(c404.84,1726.82) U12.4@461,1726.82 ; U12.4@455.34,1720.66 ccw(c441.69,1734.31) 461,1734.31 ccw(c480.31,1734.31) U12.4@466.66,1720.66 ; U12.4@466.66,1704.34 cw(c480.31,1690.69) 480.31,1710 cw(c480.31,1729.31) U12.4@466.66,1715.66 ; U12.4@473.17,1710 cw(c473.17,1651.71) C68.1@514.39,1692.93 ; C68.1@525.3,1692.93 cw(c566.51,1651.71) 566.51,1710 ; v2@619.39,400.61 ccw(c593.79,426.21) 630,426.21 ccw(c666.21,426.21) v2@640.61,400.61 ; v2(630,390) v2@630,475 ; 630,431.72 cw(c683.28,431.72) v2@645.61,469.39 ; v2(635,480) v2@640,485 ; 642.42,3767.58 ccw(c700.02,3825.18) R98.2@700.02,3743.72 ; v2@654.39,2894.39 cw(c604.64,2844.64) 675,2844.64 ; v2@659.39,2565.61 ccw(c621.72,2603.28) 675,2603.28 ; v2@665,735 665,770 715,820 715,955 810,1050 810,1265 1015.06,1470.06 v2(1029.94,1470.06) ; v2@670,745 cw(c742.43,745) 691.21,796.21 ; v2(670,2555) 675,2560 675,2900 v2@670,2905 ; R110.1@674.56,4140.46 ccw(c661.39,4153.63) 680.02,4153.63 ccw(c698.65,4153.63) R110.1@685.47,4140.46 ; 676.56,3733.44 ccw(c700.02,3756.9) R98.2@700.02,3723.72 ; R110.1@680.02,4135 680.02,4185.02 ; R98.2@694.56,3730.55 ccw(c681.39,3717.38) 681.39,3736.01 ccw(c681.39,3754.64) R98.2@694.56,3741.46 ; R98.2@700.02,3736.01 673.99,3736.01 590,3820 590,4025 615,4050 615,4190 ; 726.72,1770 ccw(c726.72,1823.28) v2@764.39,1785.61 ; v3(728.88,3228.88) 751.12,3228.88 768,3212 U6.1@768,3164 770,3162 v2(770,3005) ; 750.44,3229.56 cw(c712.89,3192) U6.1@766,3192 ; v2@759.39,3015.61 ccw(c733.79,3041.21) 770,3041.21 ccw(c806.21,3041.21) v2@780.61,3015.61 ; 768.43,126.57 790,105 R51.1@804.98,105 ; 775.92,119.08 ccw(c794.91,138.07) R51.1@802.74,112.38 ; D2.3@836,453 D2.3@847.02,464.02 ; D2.3@846.39,446.05 cw(c880,423.6) v3@880,464.02 ; v3@870.48,446.93 ccw(c847.02,439.36) D2.3@847.02,464.02 ; v3@889.13,445.93 cw(c917,433.51) R18.1@917,464.02 v3@880,464.02 ; R18.1@911.54,458.56 ccw(c898.37,445.39) 898.37,464.02 ccw(c898.37,482.65) R18.1@911.54,469.47 ; 978.92,1433.92 cw(c1029.94,1382.9) v2@1029.94,1455.06 ; 1035,3898.28 ccw(c1088.28,3898.28) v2@1050.61,3860.61 ; R115.2@1062.56,3730.55 ccw(c1049.39,3717.38) 1049.39,3736.01 ccw(c1049.39,3754.64) R115.2@1062.56,3741.46 ; R115.2@1068.02,3736.01 1033.99,3736.01 1020,3750 1020,3830 v2(1040,3850) 1035,3855 1035,4190 ; R127.1@1130.56,4140.46 ccw(c1117.39,4153.63) 1136.02,4153.63 ccw(c1154.65,4153.63) R127.1@1141.47,4140.46 ; R127.1@1136.02,4135 1136.02,4188.98 ; v3@1187.93,452.93 cw(c1170.86,435.86) 1195,435.86 cw(c1219.14,435.86) v3@1202.07,452.93 ; v3@1195,455 1195,375 1380,190 1380,115 1390,105 R53.1@1419.98,105 ; C61.2@1195,2632.16 1195,2720 ; 1195,2682.47 ccw(c1258.44,2682.47) C61.2@1213.58,2637.61 ; 1195,2745 1195,2720 ; C61.2@1208.12,2632.16 1208.12,2616.88 1355,2470 1650,2470 1663.88,2483.88 1663.88,2485 ; C61.2@1215.84,2632.16 ccw(c1271.36,2632.16) 1232.1,2592.9 ; v3(1335,450) 1345,440 1491,440 D3.3@1504,453 1569.98,453 R19.1@1581,464.02 ; v2@1335,2965 1295,2965 1195,2865 1195,2720 ; v2@1339.39,2954.39 ccw(c1313.79,2928.79) 1313.79,2965 ccw(c1313.79,3001.21) v2@1339.39,2975.61 ; v3@1342.07,457.07 ccw(c1383.28,498.28) 1383.28,440 ; R53.1@1414.53,99.54 ccw(c1401.35,86.37) 1401.35,105 ccw(c1401.35,123.63) R53.1@1414.53,110.46 ; 1442.44,440 ccw(c1442.44,514.56) D3.3@1495.16,461.84 ; R116.2@1494.56,3730.55 cw(c1481.39,3717.38) 1500.02,3717.38 cw(c1518.65,3717.38) R116.2@1505.47,3730.55 ; R128.1@1498.56,4140.46 ccw(c1485.39,4153.63) 1504.02,4153.63 ccw(c1522.65,4153.63) R128.1@1509.47,4140.46 ; v2@1500.02,3694.98 R116.2@1500.02,3736.01 ccw(c1547.96,3736.01) v2@1515.24,3700.96 ; R128.1@1504.02,4135 1504.02,4170.98 1485,4190 1035,4190 ; D3.3@1512.84,444.16 cw(c1534.18,422.82) 1534.18,453 cw(c1534.18,483.18) D3.3@1512.84,461.84 ; 1535.78,453 ccw(c1535.78,509.24) R19.1@1575.54,469.47 ; U7.1@1614.39,3199.39 cw(c1591.2,3176.2) U7.1@1624,3176.2 ; U7.1@1624,3160 1624,3209 v2(1625,3210) ; U7.1@1624,3171.37 cw(c1663.63,3171.37) U7.1@1635.61,3199.39 ; C62.2@1658.42,2522.39 cw(c1645.25,2509.21) 1663.87,2509.21 cw(c1682.5,2509.21) C62.2@1669.33,2522.39 ; C62.2@1663.88,2527.84 1663.88,2485 ; v3@1832.93,452.93 cw(c1779.64,399.64) 1855,399.64 ; v3@1840,455 1855,440 1855,345 1920,280 1920,125 1940,105 R55.1@2023.98,105 ; 1842.57,2540 ccw(c1842.57,2627.43) v2@1904.39,2565.61 ; v2(1855,3305) 1895,3305 2012,3422 J4.1@2012,3430 ; v2@1865.61,3294.39 cw(c1891.21,3268.79) 1891.21,3305 cw(c1891.21,3341.21) v2@1865.61,3315.61 ; 1890.86,2540 ccw(c1890.86,2579.14) v2@1918.54,2551.46 ; v2@1904.39,2544.39 cw(c1878.79,2518.79) 1915,2518.79 cw(c1951.21,2518.79) v2@1925.61,2544.39 ; 1915,2455 1915,2465 ; v2(1915,2555) v2@1915,2540 ; 1975.46,3385.46 ccw(c1934.4,3426.53) J4.1@1992.47,3426.53 ; 1986.39,3396.39 cw(c2012,3370.79) J4.1@2012,3407 ; J4.1@2000.59,3453.32 ccw(c1967.73,3499) 2024,3499 ; J4.1@2012,3432 J4.1@2012,3430 ; R55.1@2018.53,99.54 ccw(c2005.35,86.37) 2005.35,105 ccw(c2005.35,123.63) R55.1@2018.53,110.46 ; v2@2020,3700 2107.06,3700 2119.96,3687.1 R144.2@2124.17,3687.1 ; v2@2030.61,3715.61 ccw(c2068.28,3753.28) 2068.28,3700 ; D4.3@2040,453 2113.98,453 R20.1@2125,464.02 v3(2125,425) ; D4.3@2048.84,444.16 cw(c2070.18,422.82) 2070.18,453 cw(c2070.18,483.18) D4.3@2048.84,461.84 ; 2074.4,3700 cw(c2074.4,3637.33) 2118.71,3681.65 cw(c2105.54,3668.47) 2124.16,3668.47 cw(c2142.79,3668.47) R144.2@2129.62,3681.65 ; 2079.78,453 ccw(c2079.78,509.24) R20.1@2119.54,469.47 ; v3@2117.93,432.07 ccw(c2100.86,449.14) 2125,449.14 ccw(c2149.14,449.14) v3@2132.07,432.07 ; R144.2@2118.71,3692.56 ccw(c2105.54,3705.73) 2124.16,3705.73 ccw(c2142.79,3705.73) R144.2@2129.62,3692.56 ; R20.1@2119.54,458.56 cw(c2106.37,445.39) 2125,445.39 cw(c2143.63,445.39) R20.1@2130.46,458.56 ; R144.2@2122.06,3685 R144.2@2124.17,3687.1 ; R144.2@2124.17,3695.1 2124.17,3757.16 U11.4@2126,3759 ; 2124.16,3735.26 cw(c2149.74,3735.26) U11.4@2131.66,3753.34 ; BLE.6@2224,1979 cw(c2224,1918.64) 2266.68,1961.32 cw(c2309.36,2004) BLE.6@2249,2004 ; BLE.6@2227.26,2007.79 ccw(c2247.46,2031.32) 2269.39,2009.39 ; BLE.6@2240.29,2022.97 ccw(c2261.56,2047.73) 2284.65,2024.65 ; BLE.6@2246.47,1993.05 cw(c2264,1984.5) 2264,2004 ; BLE.6@2246.47,2014.95 ccw(c2264,2023.5) 2264,2004 ; J3.1@2420.86,1717.86 ccw(c2386.72,1683.72) 2386.72,1732 ccw(c2386.72,1780.28) J3.1@2420.86,1746.14 ; J3.1@2436,1732 2323,1732 2280,1775 2280,1948 BLE.6@2224,2004 2264,2004 ; 615,4190 1035,4190 ; D2.3@847.02,464.02 v3@880,464.02 ; 1663.88,2485 1735.88,2485 1790.88,2540 v2@1915,2540 ; 1915,2465 v2@1915,2540 ; 1915,2465 1915,2435 2065,2285 2255,2285 2284.65,2255.35 2284.65,2024.65 ; J4.1@2012,3430 2022,3430 2024,3432 2024,3499 ; 2024,3499 2124.17,3599.16 R144.2@2124.17,3687.1 ; 2264,2004 2284.65,2024.65 ; 433.5,1801.5 cw(c410.83,1778.84) 442.41,1773.31 ccw(c410.83,1778.84) 433.5,1801.5
  other v2: 655,745 775,1775 665,2905 1505,3690 2020,3705
  other v3: 1195,460 1840,460
VCCEXT: E5.1 J5.4 J6.4 J7.4 J8.4 J9.4 J9.10 J9.16 J9.22 L2.2 R135.2 | length 12180.9
  Top Layer w20: v2(90,3785) 130,3825 130,3990 190,4050 1320,4050 1370,4000 1480,4000 1530,4050 1625,4050 1646.42,4028.58 J9.22@1646.42,3991.72 ; v2@90,3800 ccw(c90,3836.21) 115.61,3810.61 ccw(c141.21,3785) v2@105,3785 ; J9.4@334.79,4008.07 ccw(c304.81,4038.05) 347.2,4038.05 ccw(c389.6,4038.05) J9.4@359.62,4008.07 ; J9.4@347.2,3991.72 347.2,4047.2 ; J9.10@767.86,4008.07 ccw(c737.88,4038.05) 780.27,4038.05 ccw(c822.67,4038.05) J9.10@792.69,4008.07 ; J9.10@780.27,3991.72 780.27,4045.27 ; J9.16@1200.93,4008.07 ccw(c1170.95,4038.05) 1213.35,4038.05 ccw(c1255.74,4038.05) J9.16@1225.76,4008.07 ; J9.16@1213.35,3991.72 1213.35,4043.35 ; 1635.15,4039.85 cw(c1599.96,4004.67) J9.22@1648.81,3995.19
  Top Layer w30: -61.21,3088.79 cw(c-10,3037.57) v3@-10,3110 ; L2.2@17.38,3091.33 ccw(c-36.14,3039.04) -36.14,3113.86 ; L2.2@17.38,3136.39 cw(c-36.14,3188.67) -36.14,3113.86 ; 40,1460 40,1420 ; L2.2@118.36,3091.06 cw(c173.4,3036.01) 173.4,3113.86 cw(c173.4,3191.7) L2.2@118.36,3136.66 ; 223.17,3111.83 cw(c131.84,3020.5) E5.1@261,3020.5 ; E5.1@265.39,3031.11 ccw(c239.79,3056.71) 276,3056.71 ccw(c312.21,3056.71) E5.1@286.61,3031.11 ; J5.4@265.59,270.46 265.59,235 395.59,105 675,105 750,180 860.08,180 ; 274.38,3060.62 cw(c234.27,3020.5) E5.1@291,3020.5 ; E5.1@276,2988 276,3059 221.14,3113.86 155,3113.86 ; J5.4@278.15,266.52 ccw(c384.57,266.52) 309.32,191.27 ; 845.08,180 860.08,180 ; J6.4@851.2,257.64 cw(c829.76,236.2) 860.08,236.2 cw(c890.4,236.2) J6.4@868.96,257.64 ; J6.4@860,270.38 J6.4@860.08,270.46 860.08,180 ; 1034.64,264.64 cw(c1120,179.29) v2@1120,300 ; 1060,290 cw(c1096.02,253.99) v2@1116.06,300.81 ; 1085.86,315.86 cw(c1120,281.72) v2@1120,330 ; v2(1120,310) 1080,310 995,225 995,180 ; 1210,1210 ccw(c1282.95,1282.95) v2@1289.38,1179.98 ; 1257.02,1162.98 ccw(c1288.48,1194.44) v2@1291.25,1150.04 ; v2(1290,1170) 1250,1170 1190,1230 1080,1230 970,1340 730,1340 695,1375 550,1375 490,1315 85,1315 40,1360 40,1420 ; J7.4@1449.62,257.64 cw(c1428.18,236.2) 1458.5,236.2 cw(c1488.82,236.2) J7.4@1467.38,257.64 ; 1458.5,106.5 1458.5,200 ; 1458.5,136.5 1458.5,200 ; J7.4@1458.5,270.46 1458.5,200 ; v2(1965,160) 1965,120 1950,105 1085,105 1010,180 995,180 ; -36.14,3113.86 -65,3085 -65,1920 -110,1875 -110,1735 40,1585 40,1420 ; -36.14,3113.86 L2.2@68,3113.86 155,3113.86 ; 155,3113.86 ccw(c155,3075.2) 122.59,3096.28 cw(c155,3075.2) 155,3113.86 ; 155,3113.86 cw(c155,3152.52) 122.59,3131.44 ccw(c155,3152.52) 155,3113.86 ; 860.08,180 995,180
  Bottom Layer w20: v3@-19.97,3114.22 cw(c11.87,3116.7) -10.71,3139.29 ; v3@-10,3123.08 -10,3140 20,3170 ; v3@-0.03,3115.78 cw(c68.85,3121.14) 20,3170 ; v2(90,3785) 90,3770 255.99,3604.01 255.99,3170 ; v2@105,3785 ccw(c177.43,3785) 126.21,3733.79 ; 235,3170 220,3170 ; R135.2@250.54,3125.47 ccw(c237.36,3138.65) 255.99,3138.65 ccw(c274.62,3138.65) R135.2@261.45,3125.47 ; R135.2@255.99,3120.02 255.99,3170 ; 20,3170 220,3170 ; 220,3170 255.99,3170
  Bottom Layer w30: v2(1120,310) 1085,345 1085,595 1185,695 1185,755 1170,770 1170,820 1210,860 1210,930 ; 1210,875 1210,930 ; 1210,1005 1210,990 ; 1230.25,1135.25 cw(c1290,1075.5) v2@1290,1160 ; v2(1290,1170) 1265,1170 1210,1115 1210,990 ; v2(1965,160) 1965,185 1995,215 ; v2@1974.97,160.78 cw(c2043.85,166.14) 1995,215 ; 2028.68,223.68 ccw(c1995.52,256.83) J8.4@2041.78,264.47 ; J8.4@2054.17,270.46 2054.17,249.17 2020,215 1995,215 ; 1210,930 1210,990
  other v3: -10,3115
VIN: D7.1 D8.1 Q11.3 R155.2 R156.2 | length 2001.2
  Top Layer w25: v2@-5,2632.6 70,2557.6 ; v2@7.5,2650 ccw(c79.68,2650) 28.64,2598.96
  Top Layer w30: v4@-65.61,1800.61 ccw(c-91.21,1826.21) -55,1826.21 ccw(c-18.79,1826.21) v4@-44.39,1800.61 ; v4(-55,1790) -55,1850 20,1925 20,2070 4,2086 D8.1@4,2102 ; v2@-15,2647.52 cw(c31.31,2647.52) D7.1@10.84,2689.06 ; v2@-15,2650 D7.1@-15,2712 ; D7.1@-15,2698.28 ccw(c43.28,2698.28) v2@2.07,2657.07 ; D8.1@-5.14,2087.86 cw(c-65.84,2027.16) 20,2027.16 ; v2@-5,2632.6 v2(-5,2650) ; v2(70,2520) 70,2557.6
  Bottom Layer w25: 16.01,2321.85 50,2355.84 50,2500 ; 50,2441.54 cw(c148.46,2441.54) v2@78.84,2511.16 ; 50,2501.89 cw(c88.11,2501.89) v2@61.16,2528.84
  Bottom Layer w30: v4@-65.61,1800.61 ccw(c-98.48,1833.48) R155.2@-51.99,1833.48 ; R155.2@-49.31,1835.54 ccw(c-0.54,1827.46) Q11.3@-35.5,1792.5 ; R155.2@-49.28,1835.98 cw(c12.01,1835.98) -31.32,1879.32 ; Q11.3@-22,1779 -51.99,1808.99 R155.2@-51.99,1835.98 ; Q11.3@-19.32,1788.51 cw(c-1.16,1835.98) R155.2@-51.99,1835.98 ; 16.01,2316.01 16.01,2270 ; 16.01,2321.85 16.01,2270 ; 50,2500 v2(70,2520) ; R155.2@-51.99,1835.98 -51.99,1858.65 -15,1895.65 -15,1992.98 R156.2@16.01,2023.98 16.01,2270
VREF: C12.2 R6.2 R8.2 U1.32 U3.3 | length 928.7
  Top Layer w10: U1.32@1211.23,1712.26 1306.98,1808.02 ; 1316.47,1817.5 ccw(c1305.46,1828.51) v1@1317.36,1838.55 ; 1318.97,1820 1306.98,1808.02 ; 1324.16,1825.19 ccw(c1313.81,1835.55) v1(1325,1845) 1325,1826.03 1306.98,1808.02
  Bottom Layer w10: v1(1325,1845) 1408.01,1845 1414.02,1845 ; v1@1332.07,1837.93 cw(c1349.14,1820.86) 1349.14,1845 cw(c1349.14,1869.14) v1@1332.07,1852.07
  Bottom Layer w20: 1390,1976.87 ccw(c1446.87,1976.87) U3.3@1406.66,1936.66 ; U3.3@1395.34,1925.34 cw(c1364.77,1894.77) 1408.01,1894.77 ; R8.2@1402.55,1870.53 cw(c1389.38,1857.35) 1408.01,1857.35 cw(c1426.64,1857.35) R8.2@1413.46,1870.53 ; R8.2@1402.55,1881.44 ccw(c1389.38,1894.61) 1408.01,1894.61 ccw(c1426.64,1894.61) R8.2@1413.46,1881.44 ; C12.2@1404.74,2075.94 cw(c1367.1,2075.94) 1393.72,2049.32 cw(c1420.33,2022.71) C12.2@1420.33,2060.35 ; R6.2@1408.01,1819.98 1408.01,1845 R8.2@1408.01,1875.98 1408.01,1923.99 1390,1942 1390,2045.61 C12.2@1420.33,2075.94 ; R6.2@1402.55,1825.44 ccw(c1389.38,1838.61) 1408.01,1838.61 ; R6.2@1402.55,1825.44 ccw(c1389.38,1838.61) 1408.01,1838.61 ; R6.2@1402.55,1825.44 ccw(c1389.38,1838.61) 1408.01,1838.61 ; 1408.01,1838.61 ccw(c1426.64,1838.61) R6.2@1413.46,1825.44 ; 1408.01,1838.61 ccw(c1426.64,1838.61) R6.2@1413.46,1825.44 ; 1408.01,1838.61 ccw(c1426.64,1838.61) R6.2@1413.46,1825.44
VS_CS: U1.40 U14.23 | length 1987.8
  Top Layer w10: 1420,1735.18 ccw(c1441.66,1735.18) U1.40@1426.34,1719.86 ; U1.40@1447.86,1698.35 1420,1726.21 1420,1745 1430,1755 1430,1790 1400,1820 1400,1925 1160,2165 1160,2235 1495,2570 v1(1495,2590) cw(c1446.72,2590) 1480.86,2555.86 ; 1463.79,2538.79 ccw(c1412.57,2590) v1@1485,2590 ; 1497.93,2572.93 ccw(c1480.86,2590) v1@1505,2590
  Bottom Layer w10: v1(1495,2590) 1530,2590 1555,2565 1860,2565 1962.5,2667.5 2022.5,2667.5 2043.74,2688.74 U14.23@2043.74,2739.57 ; v1@1502.07,2582.93 cw(c1519.14,2565.86) 1519.14,2590 cw(c1519.14,2614.14) v1@1502.07,2597.07
VS_DREQ: U1.89 U14.8 | length 1200.9
  Top Layer w10: U1.89@1670.57,2505.67 1785,2620.1 1785,2770 1775,2780 1775,2900 1915,3040 2205,3040 2230,3015 v1@2230,2885 ; v1@2217.93,2887.07 ccw(c2188.79,2916.21) 2230,2916.21
  Bottom Layer w10: v1@2230,2885 2243.54,2871.46 U14.8@2293.74,2871.46
  other v1: 2225,2880
VS_MISO: U1.112 U14.30 | length 1215
  Top Layer w10: 1195,2810 1195,2775 ; U1.112@1225.15,2728.38 1195,2758.53 1195,2775 ; v1(1240,2855) 1215,2855 1195,2835 1195,2775
  Bottom Layer w10: v1@1232.93,2847.93 cw(c1215.86,2830.86) 1240,2830.86 cw(c1264.14,2830.86) v1@1247.07,2847.93 ; v1(1240,2855) 1240,2800 1290,2750 1475,2750 1525,2700 1530,2700 1585,2645 1695,2645 1802.5,2752.5 1802.5,2782.5 1911.15,2891.15 U14.30@1970.91,2891.15
VS_MOSI: U1.113 U14.29 | length 1027.6
  Top Layer w10: U1.113@1211.23,2714.46 1245.7,2680 v1(1260,2680)
  Bottom Layer w10: v1(1260,2680) ccw(c1260,2704.14) 1277.07,2687.07 ; v1@1260,2690 ccw(c1260,2738.28) 1294.14,2704.14 ; v1@1270,2680 1320,2730 1365,2730 ; 1345,2730 1365,2730 ; U14.29@1970.91,2871.46 1916.46,2871.46 1825,2780 1825,2745 1705,2625 1580,2625 1525,2680 1515,2680 1465,2730 1365,2730
VS_RST: U1.100 U14.3 | length 1205.6
  Top Layer w10: U1.100@1517.46,2658.78 1580,2721.32 1580,2805 1750,2975 1820,2975 1905,3060 2050,3060 2215,3060 2230,3045 v1(2270,3045) ; v1@2262.93,3037.93 ccw(c2245.86,3020.86) 2245.86,3045 ccw(c2245.86,3069.14) v1@2262.93,3052.07
  Bottom Layer w10: v1(2270,3045) 2285,3030 2340,3030 2350,3020 2350,2975 2344.89,2969.89 U14.3@2293.74,2969.89
VS_SCK: U1.111 U14.28 | length 937.9
  Top Layer w10: U1.111@1239.07,2742.3 1286.37,2695 1300,2695 ; 1288.85,2695 1300,2695 ; v1(1325,2695) 1300,2695
  Bottom Layer w10: v1(1325,2695) 1340,2710 1455,2710 1505,2660 1520,2660 1575,2605 1715,2605 1845,2735 1845,2775 1921.78,2851.78 U14.28@1970.91,2851.78
VS_XDCS: U1.87 U14.13 | length 978
  Top Layer w10: U1.87@1698.41,2477.83 1751.58,2531 1796,2531 1806,2541 1864,2541 1895,2510 2045,2510 2060,2495 2210,2495 v1(2290,2575) ; v1@2280,2575 cw(c2255.86,2575) 2272.93,2557.93 cw(c2290,2540.86) v1@2290,2565
  Bottom Layer w10: U14.13@2240.59,2714.41 U14.13@2240.59,2739.57 2240.59,2709.41 2250,2700 2295,2700 2315,2680 2315,2600 v1(2290,2575) ; U14.13@2241.23,2704.78 ccw(c2252.78,2716.33) 2252.78,2700
pads on no net: J2.51 J2.52 J4.6 J5.0 J6.0 J7.0 J8.0 J9.0 J11.0 LCD1.1 LCD1.2 LCD1.4 LCD1.6 LCD1.20 LCD1.30 LCD1.51 LCD1.52 U1.6 U1.122 U6.8 U7.8 U10.4 U14.1 U14.2 U14.9 U14.10 U14.11 U14.12 U14.15 U14.25 U14.27 U14.36 U14.39 U14.48 USB1. Y1.3 Y1.4 Y2.3 Y2.4

## Polygon pours and split planes (outlines as drawn)
GND on Top Layer "Top Layer-No Net" (solid, remove dead copper, pour order 1000): 1.73,4266.49 2361.73,4266.49 2361.73,3571.49 2196.73,3571.49 2196.73,3216.49 2521.73,3216.49 2521.73,2476.49 2306.73,2476.49 2306.73,1796.49 2301.73,1791.49 2501.73,1791.49 2501.73,1076.49 2146.73,1076.49 2146.73,706.49 2151.73,701.49 2361.73,701.49 2361.73,1.49 1.73,1.49 1.73,706.49 216.73,706.49 216.73,1076.49 -138.27,1076.49 -138.27,1951.49 -133.27,1956.49 -98.27,1956.49 -98.27,3216.49 171.73,3216.49 171.73,3566.49 166.73,3571.49 1.73,3571.49 1.73,4266.49
GND on Bottom Layer "Top Layer-No Net" (solid, remove dead copper, pour order 1001): 0.35,4275.96 2365.35,4275.96 2365.35,3580.96 2360.35,3575.96 2195.35,3575.96 2195.35,3220.96 2520.35,3220.96 2520.35,2485.96 2515.35,2480.96 2305.35,2480.96 2305.35,1795.96 2500.35,1795.96 2500.35,1080.96 2150.35,1080.96 2150.35,705.96 2365.35,705.96 2365.35,5.96 0.35,5.96 0.35,705.96 5.35,710.96 215.35,710.96 215.35,1080.96 -134.65,1080.96 -134.65,1955.96 -139.65,1960.96 -99.65,1960.96 -99.65,3215.96 -94.65,3220.96 165.35,3220.96 165.35,3565.96 170.35,3570.96 165.35,3575.96 0.35,3575.96 0.35,4270.96

## Keep-outs
Keep-Out Layer:
  circle w5: c551.18,3592.52 r108.27
  circle w5: c1181.1,3592.52 r82.68
  circle w5: c1811.02,3592.52 r108.27
  circle w5: c1811.02,637.8 r108.27
  circle w5: c1377.95,637.8 r82.68
  circle w5: c551.18,637.8 r108.27
  lines w5: -139.06,1134.06 ccw(c-80,1134.06) -80,1075 ; -137.8,1923.23 -137.8,1954.72 ; -100,3160 cw(c-40.94,3160) -40.94,3219.06 ; 0,645 cw(c59.06,645) 59.06,704.06 ; 0,4210 cw(c59.06,4210) 59.06,4269.06 ; 0.94,59.06 ccw(c60,59.06) 60,0 ; 0.94,3629.06 ccw(c60,3629.06) 60,3570 ; 2300.94,0.94 ccw(c2300.94,60) 2360,60 ; 2305,705 cw(c2305,645.94) 2364.06,645.94 ; 2305.94,4269.06 cw(c2305.94,4210) 2365,4210 ; 2440.94,1075.94 ccw(c2440.94,1135) 2500,1135 ; 2445,1790 cw(c2445,1730.94) 2504.06,1730.94 ; 2460,3215 cw(c2460,3155.94) 2519.06,3155.94 ; 2460.94,2475.94 ccw(c2460.94,2535) 2520,2535 ; -137.8,1954.72 -137.8,1076.77 214.57,1076.77 214.57,702.76 0,702.76 0,0 2362.2,0 2362.2,702.76 2147.64,702.76 2147.64,1076.77 2500,1076.77 2500,1789.37 2303.15,1789.37 2303.15,2478.35 2519.68,2478.35 2519.68,3214.57 2194.88,3214.57 2194.88,3568.9 2362.2,3568.9 2362.2,4267.72 0,4267.72 0,3568.9 167.32,3568.9 167.32,3214.57 -98.43,3214.57 -98.43,1954.72 -137.8,1954.72

## Silkscreen, mask and mechanical layers (free items; w line width, h text height)
Top Overlay:
  text "EST V2.0" at 2185,1155 h39.37
  text "STU_Yw" at 2255,1110 h27.56
Bottom Overlay:
  circle w10: c1377.95,637.79 r157.48
  circle w10: c1181.1,3592.52 r157.48
  circle w10: c1811.02,3592.52 r157.48
  circle w10: c551.18,3592.52 r157.48
  circle w10: c551.18,637.79 r157.48
  circle w10: c1811.02,637.79 r157.48